# EAGLE board vtsc2 (EAGLE 5.06)
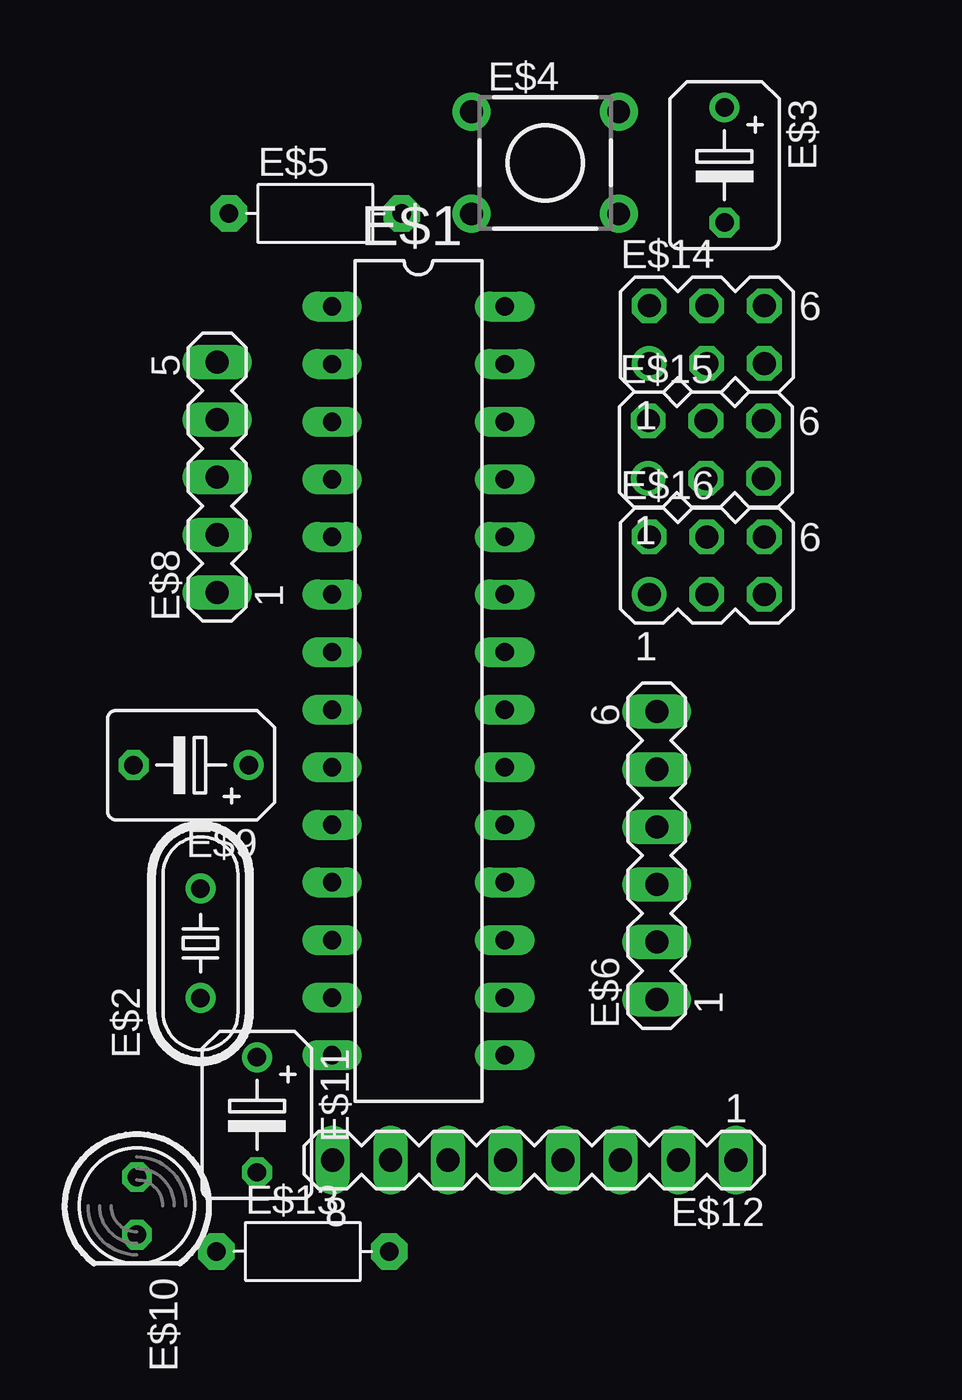
[diagram p0: board, top side]
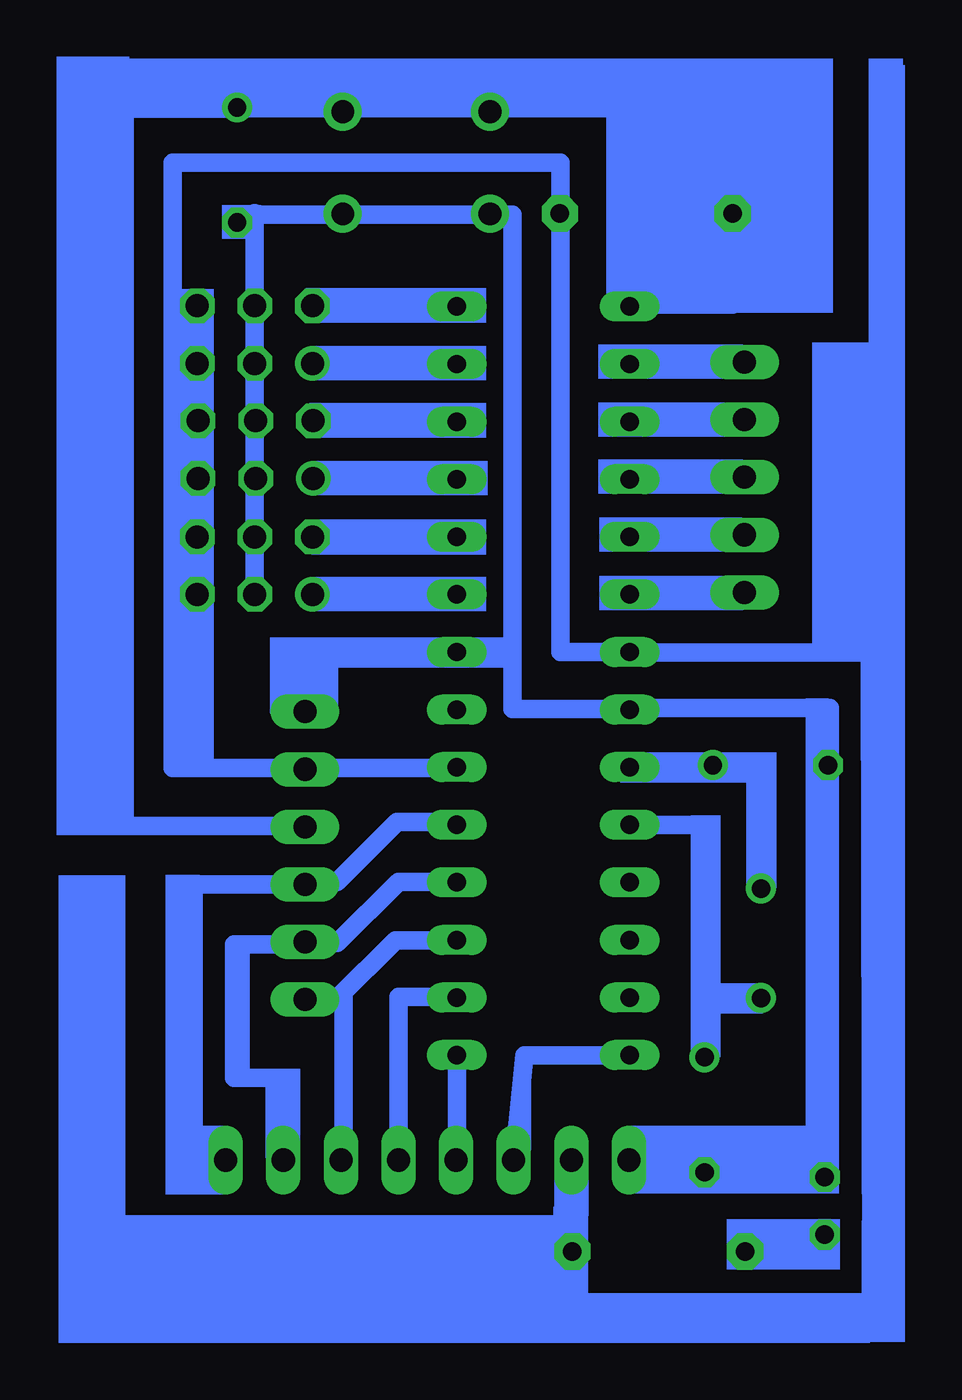
[diagram p1: board, bottom side, seen from below]

No outline drawn. Coordinates in mm, seen from the top.
Copper layers (1*16): Top 0.035mm / dielectric 1.5mm / Bottom 0.035mm
Design rules "default": minimum track width 10mil, minimum drill 24mil, track to track 8mil, track to pad 8mil, pad to pad 8mil, via to via 8mil, smd to smd 8mil, copper to edge 40mil, drill to drill 8mil, minimum pad ring 10mil, minimum via ring 8mil, stop-mask expansion 4mil, vias tented up to drill 0mil, thermal gap 10mil

## Footprints (pad centres in the part's own frame; a part is rotated, then mirrored left to right if it is on the bottom)
DIL28-3 = drill 0.813 long: 1 -16.51,-3.81; 2 -13.97,-3.81; 3 -11.43,-3.81; 4 -8.89,-3.81; 5 -6.35,-3.81; 6 -3.81,-3.81; 7 -1.27,-3.81; 8 1.27,-3.81; 9 3.81,-3.81; 10 6.35,-3.81; 11 8.89,-3.81; 12 11.43,-3.81; 13 13.97,-3.81; 14 16.51,-3.81; 15 16.51,3.81; 16 13.97,3.81; 17 11.43,3.81; 18 8.89,3.81; 19 6.35,3.81; 20 3.81,3.81; 21 1.27,3.81; 22 -1.27,3.81; 23 -3.81,3.81; 24 -6.35,3.81; 25 -8.89,3.81; 26 -11.43,3.81; 27 -13.97,3.81; 28 -16.51,3.81
HC49/S = drill 0.813 round: 1 -2.413,0; 2 2.413,0
B45181B = drill 0.813 round: + -2.54,0 | drill 0.813 octagon: - 2.54,0
TL1105 = drill 1 pad 1.676 round: 1 -2.25,3.25; 2 2.25,3.25; 3 -2.25,-3.25; 4 2.25,-3.25
R-7,5 = drill 0.813 pad 1.6 octagon: 1 -3.81,0; 2 3.81,0
MA06-1 = drill 1.016 long: 1 -6.35,0; 2 -3.81,0; 3 -1.27,0; 4 1.27,0; 5 3.81,0; 6 6.35,0
MA05-1 = drill 1.016 long: 1 -5.08,0; 2 -2.54,0; 3 0,0; 4 2.54,0; 5 5.08,0
LED5MM = drill 0.813 octagon: A -1.27,0; K 1.27,0
MA08-1 = drill 1.016 long: 1 -8.89,0; 2 -6.35,0; 3 -3.81,0; 4 -1.27,0; 5 1.27,0; 6 3.81,0; 7 6.35,0; 8 8.89,0
MA03-2 = drill 1.016 round: 1 -2.54,-1.27 | drill 1.016 octagon: 2 -2.54,1.27; 3 0,-1.27; 4 0,1.27; 5 2.54,-1.27; 6 2.54,1.27

## Placement (x,y rotation side)
E$1  [DIL28-3]  18.56,30.32 270 top
E$2  [HC49/S]  8.95,18.74 90 top
E$3  [B45181B]  32.06,53.07 270 top
E$4  [TL1105]  24.15,53.17 270 top
E$5  [R-7,5]  14.01,50.93 0 top
E$6  [MA06-1]  29.07,22.61 90 top
E$8  [MA05-1]  9.68,39.3 90 top
E$9  [B45181B]  8.53,26.6 180 top
E$10  [LED5MM]  6.14,7.16 270 top
E$11  [B45181B]  11.44,11.18 270 top
E$12  [MA08-1]  23.67,9.18 180 top
E$13  [R-7,5]  13.46,5.15 0 top
E$14  [MA03-2]  31.28,45.59 0 top
E$15  [MA03-2]  31.24,40.52 0 top
E$16  [MA03-2]  31.28,35.4 0 top

## Library data of the parts
E$1 = atmel
E$2 = crystal
E$3 E$9 E$11 = rcl
E$4 = switch
E$5 E$13 = discrete
E$6 E$8 E$12 E$14-E$16 = con-lstb
E$10 = led

## Tracks (layer width: path | path; a pad name or v marks a point on that pad's centre or on a via)
S$1
  Bottom 0.813: 14.76,29.08 19.91,29.08 19.91,31.53 | 19.91,31.53 19.91,31.59 22.48,31.59 | 19.91,31.53 19.91,50.88 32.05,50.88 32.05,50.55 32.12,50.55
S$2
  Bottom 0.813: 14.76,31.59 17.79,31.59 17.79,51.01
S$3
  Bottom 0.813: 14.76,46.92 10.2,46.92 10.2,55.57 32.12,55.57 32.12,55.7
S$4
  Bottom 0.813: 28.63,46.89 22.29,46.89 22.29,46.83
S$5
  Bottom 0.813: 28.69,44.38 22.23,44.38
S$6
  Bottom 0.813: 28.69,41.81 22.16,41.81
S$7
  Bottom 0.813: 28.76,39.23 22.36,39.23
S$8
  Bottom 0.813: 28.76,36.73 22.36,36.73 22.29,36.72
S$9
  Bottom 0.813: 22.23,34.14 28.76,34.14
S$10
  Bottom 0.813: 22.29,26.48 34.9,26.48 34.9,53.17 17.8,53.17 17.8,50.79
S$11
  Bottom 0.813: 28.69,23.91 37.01,23.91 37.01,55.55 31.99,55.55
S$12
  Bottom 0.813: 22.29,24.1 25,24.1 27.64,21.46
S$13
  Bottom 0.813: 22.36,21.46 24.93,21.46 27.64,18.75
S$14
  Bottom 0.813: 22.36,18.88 25.07,18.88 27.64,16.31
S$15
  Bottom 0.813: 29.16,28.99 29.16,31.57 22.56,31.57
S$16
  Bottom 0.813: 14.83,44.18 14.83,44.32 9.68,44.32
S$17
  Bottom 0.813: 9.68,41.87 9.68,41.74 14.77,41.74
S$18
  Bottom 0.813: 14.7,39.23 14.7,39.3 9.49,39.3
S$19
  Bottom 0.813: 14.77,36.72 14.77,36.79 9.68,36.79
S$20
  Bottom 0.813: 9.68,34.27 9.68,34.14 14.77,34.14
S$21
  Bottom 0.813: 14.7,13.8 19.39,13.8 19.85,9.24
S$22
  Bottom 0.813: 22.36,13.73 22.36,9.17
S$23
  Bottom 0.813: 22.36,16.37 24.93,16.37 24.93,8.84
S$24
  Bottom 0.813: 27.44,8.91 27.37,8.91 27.37,16.51
S$25
  Bottom 0.813: 30.08,8.91 30.08,12.8 32.19,12.8 32.19,18.69 29.16,18.69 29.16,18.75
S$26
  Bottom 0.813: 32.52,8.91 32.52,8.9 33.97,8.9 33.97,21.33 29.09,21.33 29.09,21.26
S$27
  Bottom 0.813: 17.34,9.31 17.29,2.91 4.09,2.91 4.14,31.56 14.83,31.56
S$28
  Bottom 0.813: 14.77,29.12 5.92,29.12 5.92,9.12 14.77,9.12 14.77,9.24
S$29
  Bottom 0.813: 11.53,8.45 11.53,9.11
S$30
  Bottom 0.813: 11.47,13.8 11.47,16.24 11.4,16.24 | 11.4,16.24 9.02,16.24 | 11.4,16.24 11.4,23.97 14.83,23.97
S$31
  Bottom 0.813: 14.77,26.55 9.02,26.55 9.02,21.13
S$32
  Bottom 0.813: 31.28,34.15 31.28,50.94
(copper drawn outside any net)
  shapes: Bottom area x42